# EAGLE board LissajousRevA (EAGLE 6.5.0)
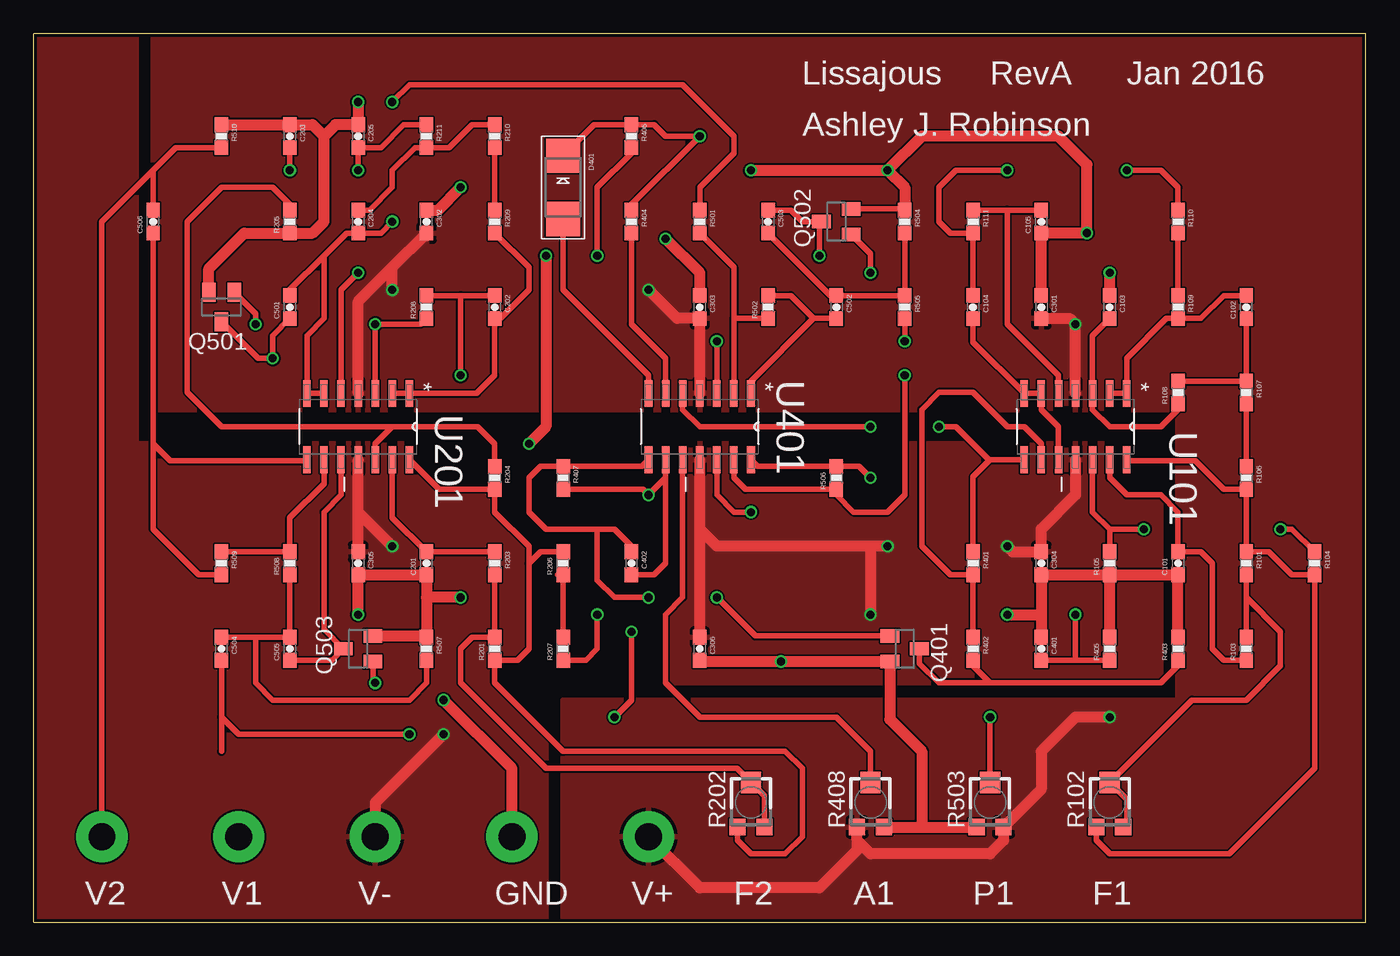
[diagram p0: board, top side]
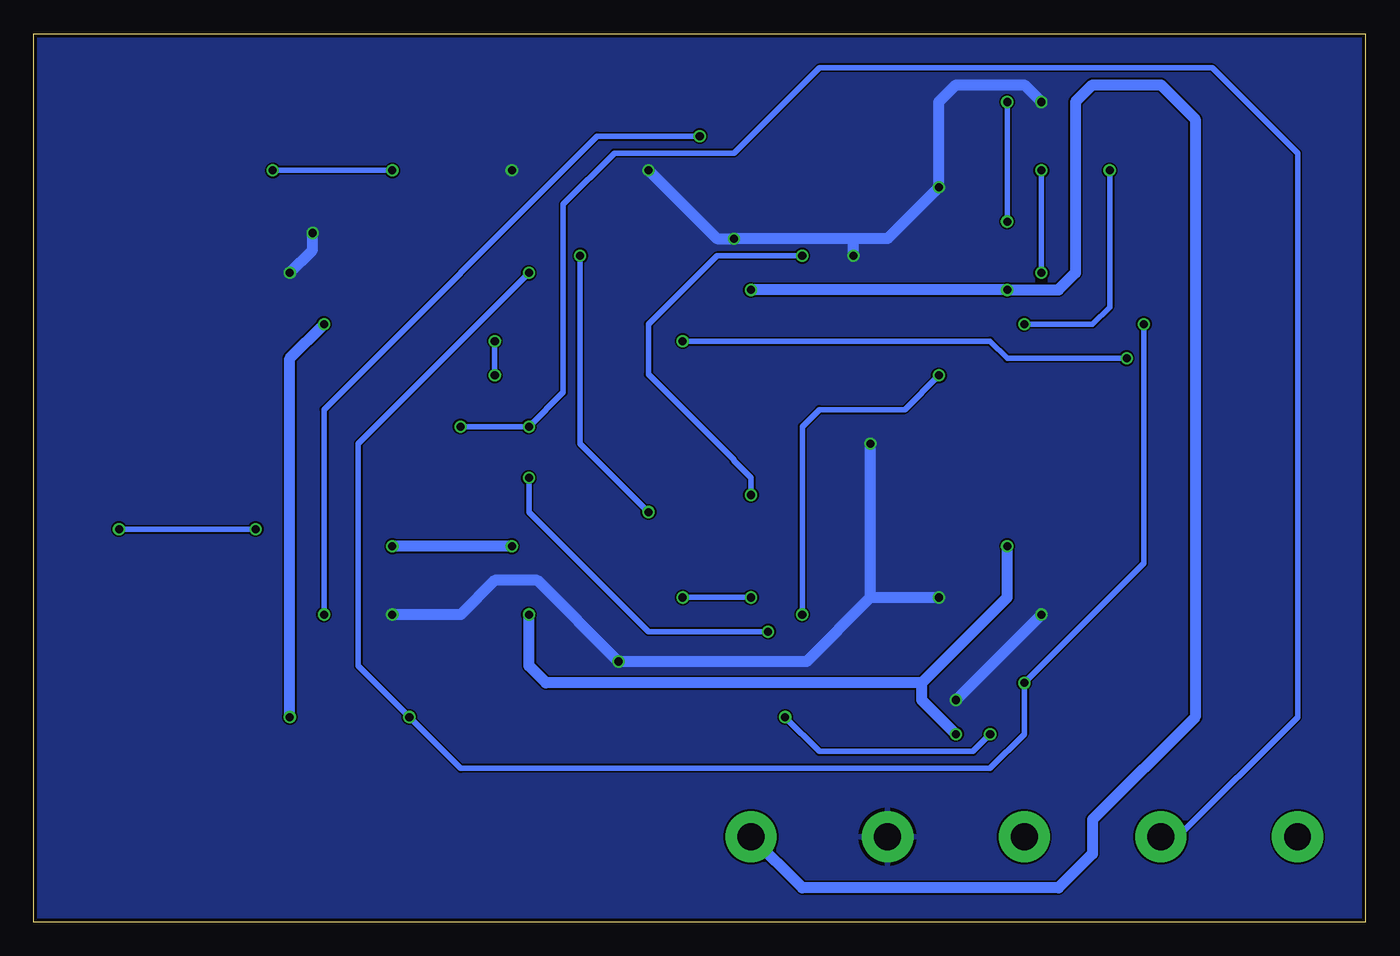
[diagram p1: board, bottom side, seen from below]

Size 99.06 x 66.04 mm. Coordinates in mm from the lower left corner, seen from the top.
Outline: 0,66.03 0,0 99.06,0 99.06,66.04 0,66.04
Copper layers (1*16): Top 0.035mm / dielectric 1.5mm / Bottom 0.035mm
Design rules "dirt_cheap_dirty_boards.v1": minimum track width 5mil, minimum drill 12mil, track to track 5mil, track to pad 5mil, pad to pad 5mil, via to via 5mil, smd to smd 0mil, copper to edge 10mil, drill to drill 10mil, minimum pad ring 10mil, minimum via ring 6mil, stop-mask expansion 2mil, vias tented up to drill 25mil, thermal gap 10mil

## Footprints (pad centres in the part's own frame; a part is rotated, then mirrored left to right if it is on the bottom)
0603-CAP = smd 1.1 x 1: 1 -0.85,0; 2 0.85,0
SMADIODE = smd 2.54 x 2.54: A 2.349,0; C -2.349,0
SOT23 = smd 1 x 1.4: 1 -0.95,-1.1; 2 0.95,-1.1; 3 0,1.1
0603-RES = smd 1.1 x 1: 1 -0.85,0; 2 0.85,0
TC33X = smd 1.2 x 1.2: 1 -1,-1.825; 3 1,-1.825 | smd 1.5 x 1.6: 2 0,1.5
PAD = drill 2 pad 3.81: P$2 0,0
SOIC127P600X175-14N = smd 1.981 x 0.559: 1 -2.464,3.81; 2 -2.464,2.54; 3 -2.464,1.27; 4 -2.464,0; 5 -2.464,-1.27; 6 -2.464,-2.54; 7 -2.464,-3.81; 8 2.464,-3.81; 9 2.464,-2.54; 10 2.464,-1.27; 11 2.464,0; 12 2.464,1.27; 13 2.464,2.54; 14 2.464,3.81

## Placement (x,y rotation side)
C101  4.7nF  [0603-CAP]  85.09,26.67 90 top
C102  4.7nF  [0603-CAP]  90.17,45.72 90 top
C103  4.7nF  [0603-CAP]  80.01,45.72 270 top
C104  4.7nF  [0603-CAP]  69.85,45.72 270 top
C105  4.7nF  [0603-CAP]  74.93,52.07 90 top
C201  4.7nF  [0603-CAP]  29.21,26.67 90 top
C202  4.7nF  [0603-CAP]  34.29,45.72 270 top
C203  4.7nF  [0603-CAP]  19.05,58.42 270 top
C204  4.7nF  [0603-CAP]  24.13,52.07 270 top
C205  4.7nF  [0603-CAP]  24.13,58.42 270 top
C301  100nF  [0603-CAP]  74.93,45.72 270 top
C302  100nF  [0603-CAP]  29.21,52.07 270 top
C303  100nF  [0603-CAP]  49.53,45.72 270 top
C304  100nF  [0603-CAP]  74.93,26.67 270 top
C305  100nF  [0603-CAP]  24.13,26.67 270 top
C306  100nF  [0603-CAP]  49.53,20.32 270 top
C401  100pF  [0603-CAP]  74.93,20.32 270 top
C402  100nF  [0603-CAP]  44.45,26.67 270 top
C501  10nF  [0603-CAP]  19.05,45.72 90 top
C502  10nF  [0603-CAP]  59.69,45.72 270 top
C503  10nF  [0603-CAP]  54.61,52.07 270 top
C504  10nF  [0603-CAP]  13.97,20.32 270 top
C505  10nF  [0603-CAP]  19.05,20.32 90 top
C506  10nF  [0603-CAP]  8.89,52.07 90 top
D401  1N4148  [SMADIODE]  39.37,54.61 270 top
Q401  [SOT23]  64.77,20.32 270 top
Q501  [SOT23]  13.97,45.72 180 top
Q502  [SOT23]  59.69,52.07 90 top
Q503  [SOT23]  24.13,20.32 90 top
R101  DNF  [0603-RES]  90.17,26.67 270 top
R102  200K  [TC33X]  80.01,8.89 0 top
R103  5K  [0603-RES]  90.17,20.32 90 top
R104  33K  [0603-RES]  95.25,26.67 270 top
R105  33K  [0603-RES]  80.01,26.67 90 top
R106  0R  [0603-RES]  90.17,33.02 270 top
R107  33K  [0603-RES]  90.17,39.37 270 top
R108  33K  [0603-RES]  85.09,39.37 90 top
R109  0R  [0603-RES]  85.09,45.72 270 top
R110  33K  [0603-RES]  85.09,52.07 270 top
R111  33K  [0603-RES]  69.85,52.07 270 top
R201  DNF  [0603-RES]  34.29,20.32 90 top
R202  200K  [TC33X]  53.34,8.89 0 top
R203  5K6  [0603-RES]  34.29,26.67 270 top
R204  33K  [0603-RES]  34.29,33.02 270 top
R205  33K  [0603-RES]  19.05,52.07 90 top
R206  0R  [0603-RES]  39.37,26.67 90 top
R207  33K  [0603-RES]  39.37,20.32 90 top
R208  33K  [0603-RES]  29.21,45.72 90 top
R209  0R  [0603-RES]  34.29,52.07 270 top
R210  33K  [0603-RES]  34.29,58.42 270 top
R211  33K  [0603-RES]  29.21,58.42 270 top
R401  1M  [0603-RES]  69.85,26.67 270 top
R402  0R  [0603-RES]  69.85,20.32 270 top
R403  DNF  [0603-RES]  85.09,20.32 90 top
R404  100K  [0603-RES]  44.45,52.07 270 top
R405  DNF  [0603-RES]  80.01,20.32 90 top
R406  5K6  [0603-RES]  44.45,58.42 270 top
R407  DNF  [0603-RES]  39.37,33.02 270 top
R408  200K  [TC33X]  62.23,8.89 0 top
R501  33K  [0603-RES]  49.53,52.07 270 top
R502  33K  [0603-RES]  54.61,45.72 90 top
R503  200K  [TC33X]  71.12,8.89 0 top
R504  33K  [0603-RES]  64.77,52.07 270 top
R505  33K  [0603-RES]  64.77,45.72 270 top
R506  33K  [0603-RES]  59.69,33.02 90 top
R507  33K  [0603-RES]  29.21,20.32 270 top
R508  33K  [0603-RES]  19.05,26.67 90 top
R509  33K  [0603-RES]  13.97,26.67 270 top
R510  33K  [0603-RES]  13.97,58.42 270 top
TO304  PAD  [PAD]  15.24,6.35 0 top
TP301  PAD  [PAD]  45.72,6.35 0 top
TP302  PAD  [PAD]  25.4,6.35 0 top
TP303  PAD  [PAD]  35.56,6.35 0 top
TP305  PAD  [PAD]  5.08,6.35 0 top
U101  LM348D  [SOIC127P600X175-14N]  77.47,36.83 270 top
U201  LM348D  [SOIC127P600X175-14N]  24.13,36.83 270 top
U401  LM348D  [SOIC127P600X175-14N]  49.53,36.83 270 top

## Library data of the parts
C101-C105 C201-C205 C301-C306 C401 C402 C501-C506 R101 R103-R111 R201 R203-R211 R401-R407 R501 R502 R504-R510 = passives
D401 Q401 Q501-Q503 R102 R202 R408 R503 = adafruit
TO304 TP301-TP303 TP305 = pad
U101 U201 U401 = LM348D; MPN: LM348D; OC_FARNELL: 9589635; OC_NEWARK: 06F9414; PACKAGE: SOIC-14; SUPPLIER: Texas Instruments

## Nets
0V: C101.1 C103.1 C105.1 C201.1 C203.1 C205.1 C301.1 C302.1 C303.1 C304.2 C305.2 C306.2 C401.1 Q401.2 Q501.2 Q502.2 Q503.2 R105.1 R205.1 R403.2 R405.2 R408.3 R503.1 R504.1 R507.1 R510.1 TP303.P$2
N$1: C101.2 R103.1 U101.13
N$2: R104.1 R105.2 U101.12
N$3: R106.1 R107.2
N$4: R101.2 R102.2 R102.3 R103.2
N$5: C103.2 R108.1 U101.3
N$6: C102.1 R107.1 R108.2
N$7: R101.1 R102.1 R104.2 R106.2 U101.14
N$8: C102.2 R109.2 U101.1 U101.2
N$9: R204.1 R205.2 U201.12
N$10: C201.2 R203.1 U201.13
N$11: C105.2 R111.1 U101.5
N$12: C104.1 R110.1 R111.2
N$13: R401.2 R402.1 U101.9
N$14: R109.1 R110.2
N$15: R201.1 R202.1 R204.2 R206.2 U201.14
N$16: C203.2 R208.1 U201.3
N$17: C202.1 R207.1 R208.2
N$18: C205.2 R211.1 U201.5
N$19: C204.1 R210.1 R211.2
N$20: C501.1 Q501.3 U401.3
N$21: C202.2 R209.2 U201.1 U201.2
N$22: R206.1 R207.2
N$23: R209.1 R210.2
N$24: R201.2 R202.2 R202.3 R203.2
N$25: C402.2 R406.2 R407.2 U401.9
N$26: R501.2 R502.1 U401.2
N$27: R404.2 U401.6
N$28: D401.A U401.7
N$29: C502.1 C503.2 R504.2 R505.1
N$30: C401.2 D401.C R404.1 R405.1 R406.1
N$31: Q401.3 R402.2 R403.1
N$32: C402.1 Q401.1 R407.1 U401.8
N$33: C502.2 R502.2 U401.1
N$34: R408.2 U401.10
N$36: C503.1 Q502.3 U401.12
N$37: R505.2 R506.1 U401.13
N$38: Q501.1 Q502.1 Q503.1 R503.2
N$39: C504.2 R506.2 U401.14
N$40: R508.2 R509.1 U201.9
N$42: C504.1 C505.2 R507.2 R508.1
N$45: C505.1 Q503.3 U201.10
N$46: C506.1 R509.2 U201.8
SINEGEN1: C104.2 U101.6 U101.7 U101.10
SINEGEN2: C204.2 C501.2 R501.1 U201.6 U201.7
V+: C301.2 C302.2 C303.2 R408.1 R503.3 TP301.P$2 U101.4 U201.4 U401.4
V-: C304.1 C305.1 C306.1 TP302.P$2 U101.11 U201.11 U401.11
VIEW1: R401.1 TO304.P$2 U101.8 U401.5
VIEW2: C506.2 R510.2 TP305.P$2

## Tracks (layer width: path | path; a pad name or v marks a point on that pad's centre or on a via)
0V  (via drill 0.6)
  Top 0.406: Q502.2 64.67,53.02 R504.1 | 29.11,21.27 R507.1 | 77.89,51.22 v78.32,51.22
  Top 0.813: R403.2 C101.1 R105.1 | R405.2 R105.1 | R105.1 C304.2 74.93,22.86 | 74.93,22.86 C401.1 | v72.39,22.86 74.93,22.86 | R408.3 66.04,7.07 | 66.04,7.07 R503.1 | 66.04,7.07 66.04,12.7 63.67,15.07 Q401.2 v55.56,19.37 49.63,19.37 arc-90 C306.2 | v53.34,55.88 v63.5,55.88 | Q503.2 29.11,21.27 | 29.21,24.13 C201.1 C305.2 v24.13,22.86 | 29.21,24.13 R507.1 | R510.1 C203.1 20.74,59.27 21.59,58.42 | 21.59,58.42 21.59,52.07 20.74,51.22 R205.1 15.66,51.22 13.02,48.58 Q501.2 | 21.59,58.42 22.44,59.27 C205.1 v24.13,60.96 | C302.1 30.06,52.92 v31.75,54.61 | C303.1 49.53,48.26 v46.99,50.8 | v31.75,24.13 29.21,24.13 | v63.5,55.88 64.77,54.61 R504.1 | C301.1 C105.1 v78.32,51.22 78.32,56.3 76.2,58.42 66.04,58.42 v63.5,55.88 | TP303.P$2 35.56,11.43 v30.48,16.51 | v38.1,49.53 38.1,36.83 v36.83,35.56 | C103.1 v80.01,48.26
  Bottom 0.813: v24.13,60.96 25.4,62.23 30.48,62.23 31.75,60.96 v31.75,54.61 35.56,50.8 38.1,50.8 | v72.39,22.86 67.31,22.86 64.77,25.4 61.59,25.4 v55.56,19.37 41.59,19.37 36.83,24.13 | v53.34,55.88 48.26,50.8 v46.99,50.8 38.1,50.8 | 36.83,24.13 v36.83,35.56 | 36.83,24.13 v31.75,24.13 | v30.48,16.51 v24.13,22.86 | v38.1,49.53 38.1,50.8 | v80.01,48.26 78.32,49.95 v78.32,51.22
  pour Bottom: -1.27,-1.27 -1.27,67.31 58.42,67.31 100.33,67.31 100.33,16.51 100.33,-1.27
N$1
  Top 0.406: U101.13 80.01,33.02 81.28,31.75 83.82,31.75 85.09,30.48 C101.2 | 85.09,27.94 C101.2 | R103.1 88.48,19.47 87.63,20.32 87.63,26.67 86.78,27.52 C101.2
N$2  (via drill 0.6)
  Top 0.406: U101.12 78.74,30.48 80.01,29.21 | R105.2 80.01,29.21 | v82.55,29.21 80.01,29.21 | R104.1 93.56,29.21 v92.71,29.21
  Bottom 0.406: v92.71,29.21 v82.55,29.21
N$3
  Top 0.406: R106.1 R107.2
N$4
  Top 0.406: R103.2 90.17,24.13 | 90.17,24.13 R101.2 | R102.3 81.28,6.79 81.28,9.12 R102.2 86.13,16.51 90.17,16.51 92.71,19.05 92.71,21.59 90.17,24.13
N$5
  Top 0.406: C103.2 78.74,43.6 U101.3 78.74,38.1 80.01,36.83 83.82,36.83 85.09,38.1 R108.1
N$6
  Top 0.406: C102.1 R107.1 R108.2
N$7
  Top 0.406: U101.14 81.36,34.29 86.36,34.29 88.48,32.17 R106.2 R101.1 91.86,27.52 93.56,25.82 R104.2 95.25,11.43 88.9,5.08 80.01,5.08 79.01,6.08 R102.1
N$8
  Top 0.406: U101.2 U101.1 | U101.1 81.28,39.37 | U101.1 81.28,41.91 84.24,44.87 R109.2 86.78,44.87 88.48,46.57 C102.2
N$9
  Top 0.406: U201.12 25.4,35.56 26.67,36.83 | 26.67,36.83 33.02,36.83 34.29,35.56 R204.1 | 26.67,36.83 13.97,36.83 11.43,39.37 11.43,52.07 13.97,54.61 17.78,54.61 19.05,53.34 R205.2
N$10
  Top 0.406: U201.13 26.67,30.06 C201.2 R203.1
N$11
  Top 0.406: U101.5 76.2,40.64 72.39,44.45 72.39,52.92 | R111.1 72.39,52.92 | 72.39,52.92 C105.2
N$12  (via drill 0.6)
  Top 0.406: C104.1 R111.2 68.16,51.22 67.31,52.07 67.31,54.61 68.58,55.88 v72.39,55.88 | R110.1 85.09,54.61 83.82,55.88 v81.28,55.88
  Bottom 0.406: v72.39,55.88 v81.28,55.88
N$13
  Top 0.406: R402.1 R401.2 68.16,25.82 66.04,27.94 66.04,38.1 67.31,39.37 69.85,39.37 72.39,36.83 73.66,36.83 74.93,35.56 U101.9
N$14
  Top 0.406: R109.1 R110.2
N$15
  Top 0.406: R206.2 37.68,27.52 36.83,26.67 | 36.83,26.67 36.83,20.32 35.98,19.47 R201.1 34.29,17.78 39.37,12.7 55.88,12.7 57.15,11.43 57.15,6.35 55.88,5.08 53.34,5.08 52.34,6.08 R202.1 | U201.14 30.14,32.17 R204.2 34.29,30.48 36.83,27.94 36.83,26.67
N$16  (via drill 0.6)
  Top 0.406: C203.2 v19.05,55.88 | U201.3 v25.4,44.45 28.79,44.45 R208.1
  Bottom 0.406: v19.05,55.88 19.05,45.72 20.32,44.45 v25.4,44.45
N$17  (via drill 0.6)
  Top 0.406: R207.1 41.06,19.47 41.91,20.32 v41.91,22.86 | R208.2 31.75,46.57 | 31.75,46.57 C202.1 | v31.75,40.64 31.75,46.57
  Bottom 0.406: v41.91,22.86 41.91,36.83 40.64,38.1 34.29,38.1 v31.75,40.64
N$18  (via drill 0.6)
  Top 0.406: U201.5 22.86,46.99 v24.13,48.26 | v24.13,55.88 C205.2 25.82,57.57 27.52,59.27 R211.1
  Bottom 0.406: v24.13,48.26 v24.13,55.88
N$19
  Top 0.406: R211.2 28.78,57.57 | R210.1 32.6,59.27 30.9,57.57 R211.2 | C204.1 24.98,52.92 26.67,54.61 26.67,55.88 28.36,57.57 R211.2
N$20  (via drill 0.6)
  Top 0.406: U401.3 v50.8,43.18 | 18.8,44.62 C501.1 17.78,43.6 v17.78,41.91 16.68,41.91 Q501.3
  Bottom 0.406: v17.78,41.91 26.67,41.91 27.94,43.18 v50.8,43.18
N$21
  Top 0.406: U201.2 U201.1 28.02,39.37 28.02,39.29 32.94,39.29 34.29,40.64 C202.2 34.71,44.87 36.83,46.99 36.83,48.68 R209.2
N$22
  Top 0.406: 38.94,25.82 R206.1 R207.2
N$23
  Top 0.406: R210.2 R209.1
N$24
  Top 0.406: R203.2 R201.2 32.6,21.17 31.75,20.32 31.75,17.78 38.1,11.43 52.3,11.43 R202.2 54.34,9.39 R202.3
N$25  (via drill 0.6)
  Top 0.406: C402.2 46.14,25.82 46.99,26.67 U401.9 46.99,33.02 v45.72,31.75 45.3,32.17 R407.2 | R406.2 44.45,57.15 41.91,54.61 v41.91,49.53
  Bottom 0.406: v45.72,31.75 45.72,33.02 46.99,34.29 U401.9 53.34,40.72 53.34,44.45 48.26,49.53 v41.91,49.53
N$26
  Top 0.406: 52.07,44.87 R502.1 | U401.2 52.07,44.45 52.07,44.87 | R501.2 52.07,48.68 52.07,44.87
N$27
  Top 0.406: R404.2 44.45,44.45 46.99,41.91 U401.6
N$28
  Top 0.406: D401.A 39.37,46.99 45.72,40.64 U401.7
N$29
  Top 0.406: R504.2 R505.1 C502.1 59.26,46.57 C503.2
N$30  (via drill 0.6)
  Top 0.406: C401.2 77.47,19.47 | 77.47,19.47 R405.1 | D401.C 41.68,59.27 R406.1 46.14,59.27 46.99,58.42 v49.53,58.42 44.45,53.34 R404.1 | v77.47,22.86 77.47,19.47
  Bottom 0.406: v49.53,58.42 57.15,58.42 77.47,38.1 v77.47,22.86
N$31
  Top 0.406: R402.2 69.85,19.05 71.12,17.78 | 71.12,17.78 83.82,17.78 85.09,19.05 R403.1 | 71.12,17.78 67.31,17.78 65.87,19.22 Q401.3
N$32  (via drill 0.6)
  Top 0.406: 45.72,34.29 U401.8 45.22,33.87 R407.1 37.68,33.87 36.83,33.02 36.83,30.48 38.1,29.21 41.91,29.21 | v50.8,24.13 53.66,21.27 Q401.1 | v45.72,24.13 43.18,24.13 41.91,25.4 41.91,29.21 | C402.1 44.45,27.94 43.18,29.21 41.91,29.21
  Bottom 0.406: v45.72,24.13 v50.8,24.13
N$33
  Top 0.406: C502.2 58,44.87 | R502.2 56.3,46.57 58,44.87 | 58,44.87 53.34,40.21 U401.1
N$34
  Top 0.406: U401.10 48.26,24.13 46.99,22.86 46.99,17.78 49.53,15.24 59.69,15.24 62.23,12.7 R408.2 62,10.16
N$36  (via drill 0.6)
  Top 0.406: 58.42,52.24 Q502.3 | U401.12 50.8,31.75 52.07,30.48 v53.34,30.48 | 58.42,51.9 Q502.3 | v58.42,49.53 58.42,52.07 Q502.3 | Q502.3 57.15,52.07 56.3,52.92 C503.1
  Bottom 0.406: v53.34,30.48 58.42,35.56 v58.42,49.53
N$37  (via drill 0.6)
  Top 0.406: 52.15,34.29 U401.13 52.07,33.02 52.92,32.17 R506.1 59.69,31.75 60.96,30.48 63.5,30.48 64.77,31.75 v64.77,40.64 | v64.77,43.18 R505.2
  Bottom 0.406: v64.77,40.64 v64.77,43.18
N$38  (via drill 0.6)
  Top 0.406: Q502.1 62.23,49.68 v62.23,48.26 | v71.12,15.24 R503.2 | 15.07,46.82 Q501.1 16.51,45.23 v16.51,44.45 | Q503.1 25.23,17.95 v25.4,17.78
  Bottom 0.406: v16.51,44.45 16.51,26.67 v25.4,17.78 25.4,13.97 27.94,11.43 67.31,11.43 v71.12,15.24 74.93,19.05 74.93,35.56 v62.23,48.26
N$39  (via drill 0.6)
  Top 0.406: U401.14 53.84,33.87 R506.2 61.38,33.87 v62.23,33.02 | C504.2 13.97,15.24 | 13.97,15.24 13.97,12.7 | v44.45,21.59 44.45,16.51 v43.18,15.24 | v27.94,13.97 15.24,13.97 13.97,15.24
  Bottom 0.406: v44.45,21.59 53.34,21.59 62.23,30.48 v62.23,33.02 | v43.18,15.24 40.64,12.7 29.21,12.7 v27.94,13.97
N$40
  Top 0.406: U201.9 21.59,32.6 19.05,30.06 R508.2 R509.1
N$42
  Top 0.406: C504.1 16.51,21.17 | 16.51,21.17 C505.2 R508.1 | 29.21,19.05 R507.2 29.21,17.78 27.94,16.51 17.78,16.51 16.51,17.78 16.51,21.17
N$45
  Top 0.406: U201.10 22.86,31.75 21.59,30.48 21.59,21.76 Q503.3 22.18,19.47 C505.1
N$46
  Top 0.406: U201.8 20.24,34.29 10.16,34.29 8.89,35.56 | R509.2 12.28,25.82 8.89,29.21 8.89,35.56 | C506.1 8.89,35.56
SINEGEN1
  Top 0.406: C104.2 69.85,43.1 U101.7 U101.6 74.93,38.1 76.2,36.83 U101.10
SINEGEN2  (via drill 0.6)
  Top 0.406: U201.6 U201.7 20.32,43.6 21.59,44.87 21.59,49.53 | 21.59,49.53 23.28,51.22 C204.2 25.82,51.22 v26.67,52.07 | v26.67,60.96 27.94,62.23 48.26,62.23 52.07,58.42 52.07,57.15 49.53,54.61 R501.1 | C501.2 19.05,46.99 21.59,49.53
  Bottom 0.406: v26.67,52.07 v26.67,60.96
V+  (via drill 0.6)
  Top 0.406: 29.21,50.8 C302.2
  Top 0.813: 61.23,6.08 R408.1 | v80.01,15.24 77.47,15.24 74.93,12.7 74.93,9.88 R503.3 72.12,6.08 71.12,5.08 62.23,5.08 61.23,6.08 | U201.4 24.13,46.14 26.67,48.68 | C301.2 77.05,44.87 v77.47,44.45 U101.4 | U401.4 C303.2 47.84,44.87 v45.72,46.99 | v26.67,46.99 26.67,48.68 | 26.67,48.68 C302.2 | 61.23,6.08 61.23,5.35 58.42,2.54 49.53,2.54 TP301.P$2
  Bottom 0.813: TP301.P$2 41.91,2.54 22.86,2.54 20.32,5.08 20.32,7.62 12.7,15.24 12.7,59.69 15.24,62.23 20.32,62.23 21.59,60.96 21.59,48.26 22.86,46.99 v26.67,46.99 v45.72,46.99 | v80.01,15.24 80.01,41.91 v77.47,44.45
  pour Top: 39.37,-1.27 39.37,16.51 85.09,16.51 85.09,38.1 8.89,38.1 8.89,67.31 100.33,67.31 100.33,-1.27
V-  (via drill 0.6)
  Top 0.813: U101.11 77.47,31.75 74.93,29.21 C304.1 72.81,27.52 v72.39,27.94 | C306.1 49.53,29.21 | 49.53,29.21 U401.11 | C305.1 24.13,30.48 | 24.13,30.48 U201.11 | v26.67,27.94 24.13,30.48 | v30.48,13.97 25.4,8.89 TP302.P$2 | v63.5,27.94 62.23,27.94 | 62.23,27.94 50.8,27.94 49.53,29.21 | 62.23,27.94 v62.23,22.86
  Bottom 0.813: 33.02,17.78 26.67,24.13 v26.67,27.94 | 33.02,17.78 60.96,17.78 62.23,19.05 v62.23,22.86 | v30.48,13.97 33.02,16.51 33.02,17.78 | v63.5,27.94 v72.39,27.94
  pour Top: 38.1,-1.27 38.1,17.78 83.82,17.78 83.82,35.56 7.62,35.56 7.62,67.31 -1.27,67.31 -1.27,-1.27
VIEW1  (via drill 0.6)
  Top 0.406: U401.5 48.26,38.1 49.53,36.83 v62.23,36.83 | R401.1 69.85,33.1 71.12,34.37 | 71.12,34.37 71.04,34.37 68.58,36.83 v67.31,36.83 | 71.12,34.37 U101.8
  Bottom 0.406: v67.31,36.83 v62.23,36.83 59.69,39.37 59.69,53.34 55.88,57.15 46.99,57.15 40.64,63.5 11.43,63.5 5.08,57.15 5.08,15.24 13.97,6.35 TO304.P$2
VIEW2
  Top 0.406: R510.2 10.58,57.57 8.89,55.88 | 8.89,55.88 C506.2 | TP305.P$2 5.08,52.07 8.89,55.88

## Text on the board
tPlace: Lissajous | RevA | Jan 2016 | Ashley J. Robinson | V2 | V1 | V- | GND | V+ | F2 | A1 | P1 | F1
Drill_legend: Drill legend | Date: 09/01/2016 13:42 | 2.0000 mm / 78.740 mil | 0.6000 mm / 23.622 mil